# Altium PCB PCB.PcbDoc
Units mm, origin at the board's own origin, x right, y up, seen from the top; angles counter-clockwise.
Board outline 100 x 52 mm, 2 copper layers (Top Layer, Bottom Layer); 89 components, 60 nets, 356 pads, 102 vias.
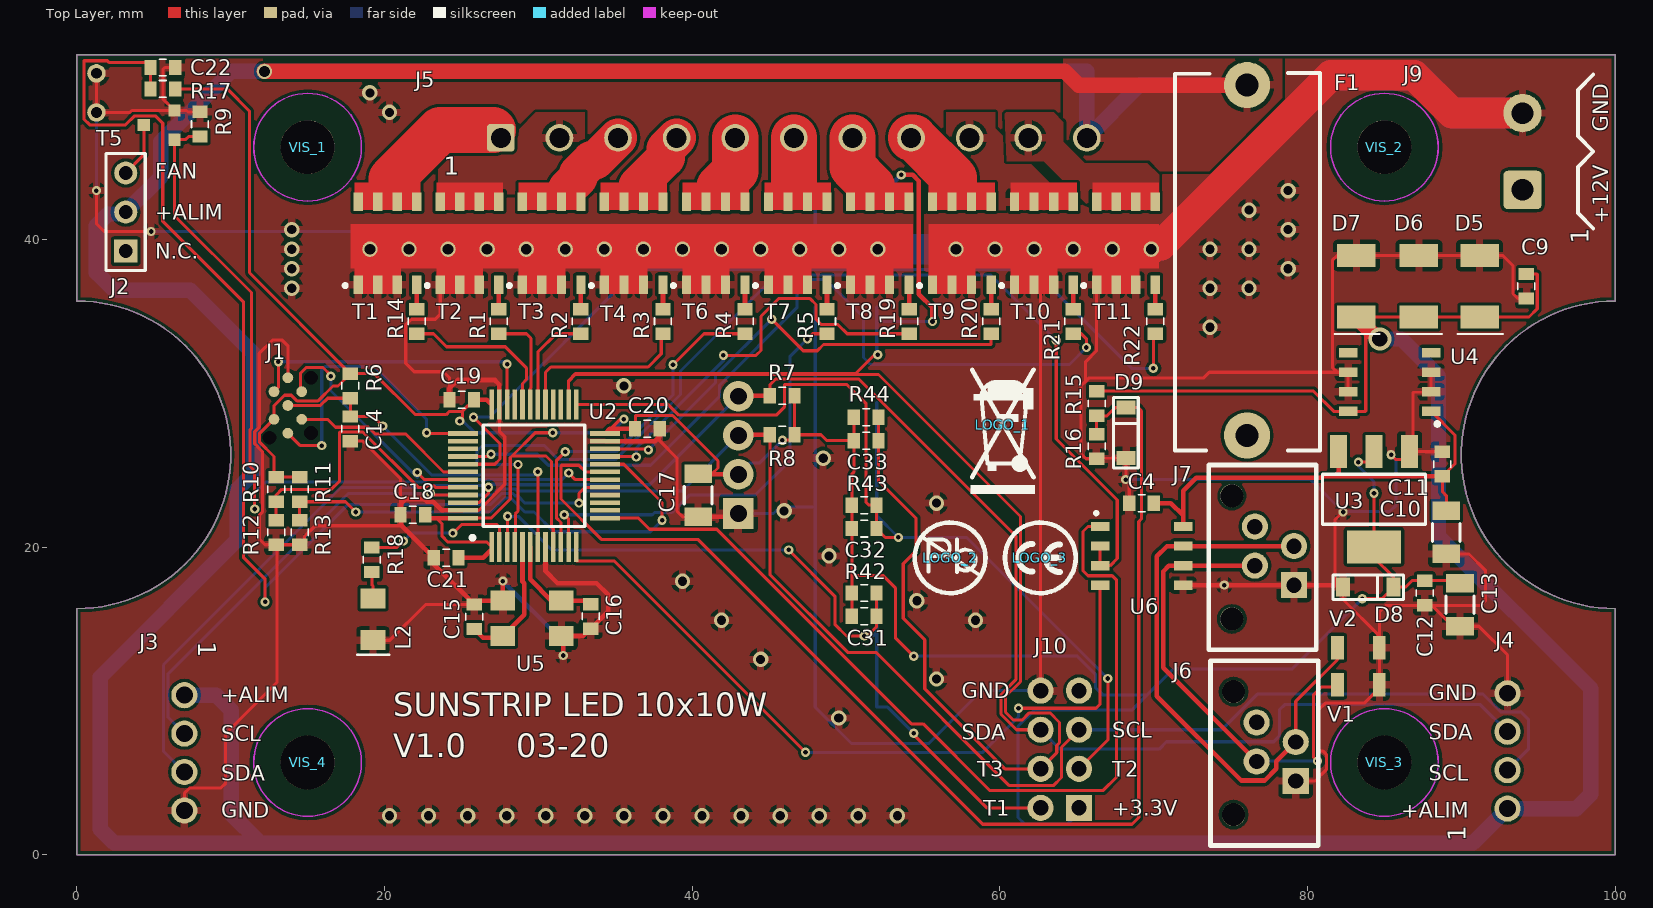
[diagram p0: Top Layer view]
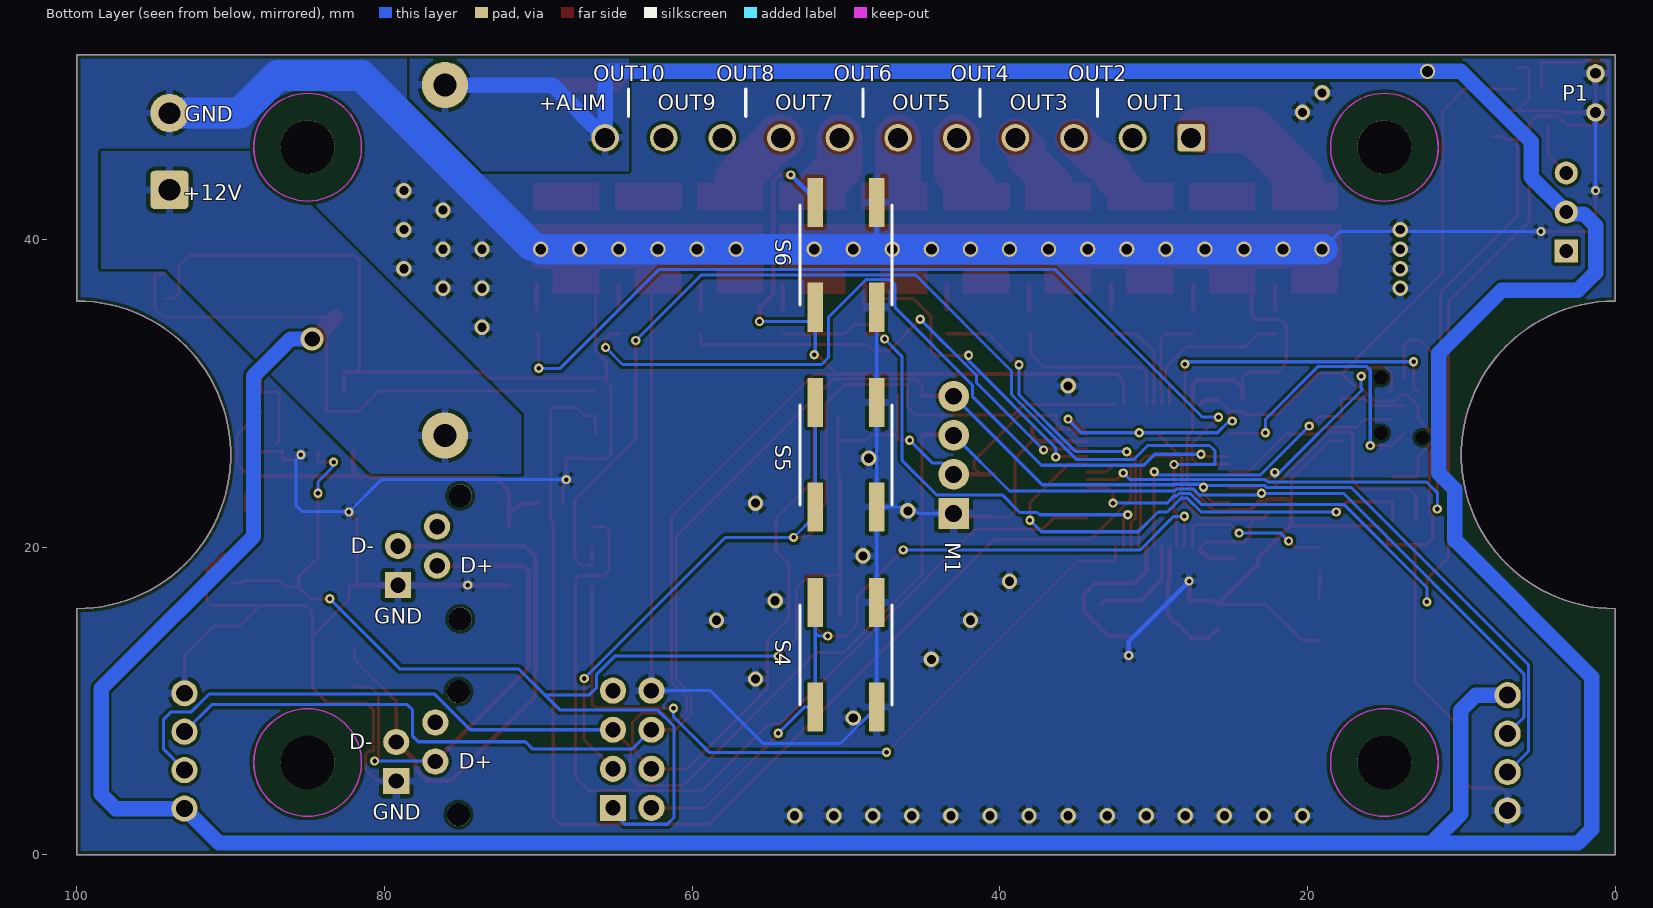
[diagram p1: Bottom Layer view, seen from below]
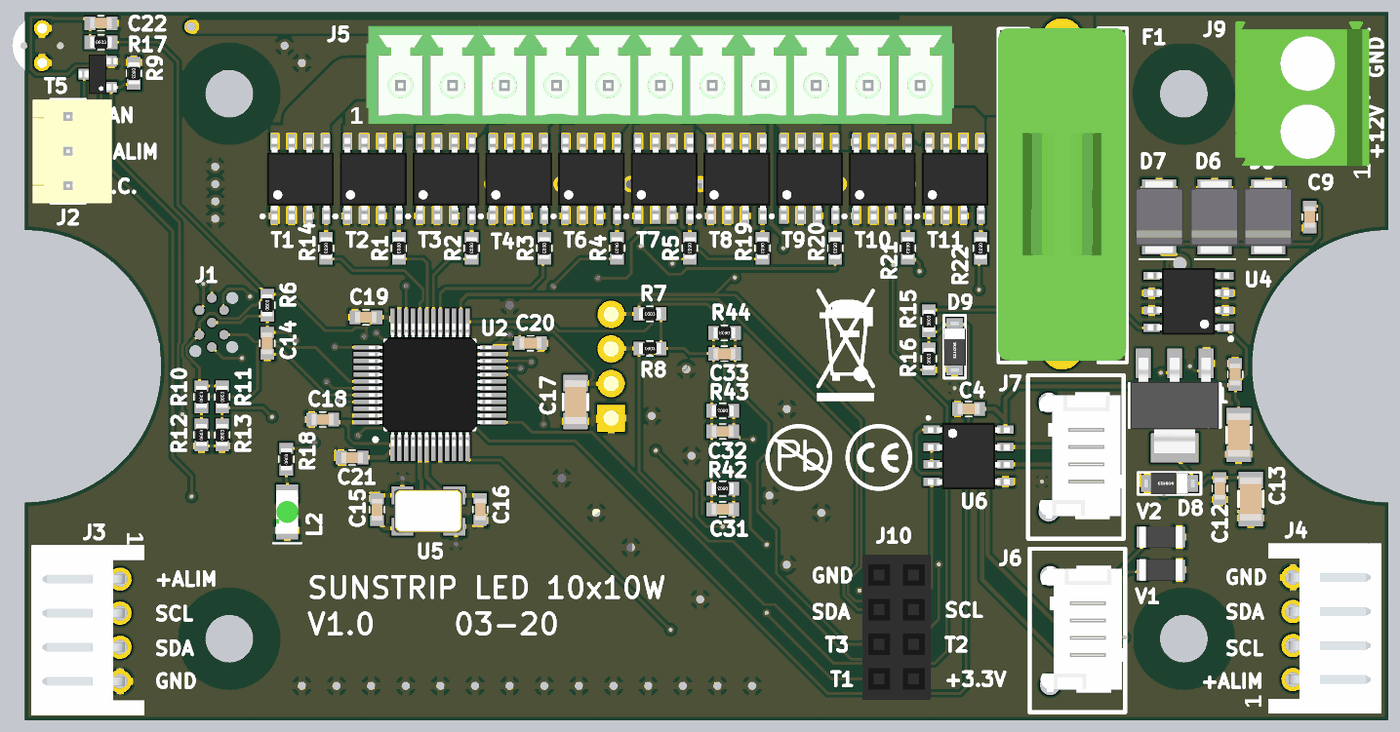
[diagram p2: 3D render of the assembled board from above, using the file's embedded part models]
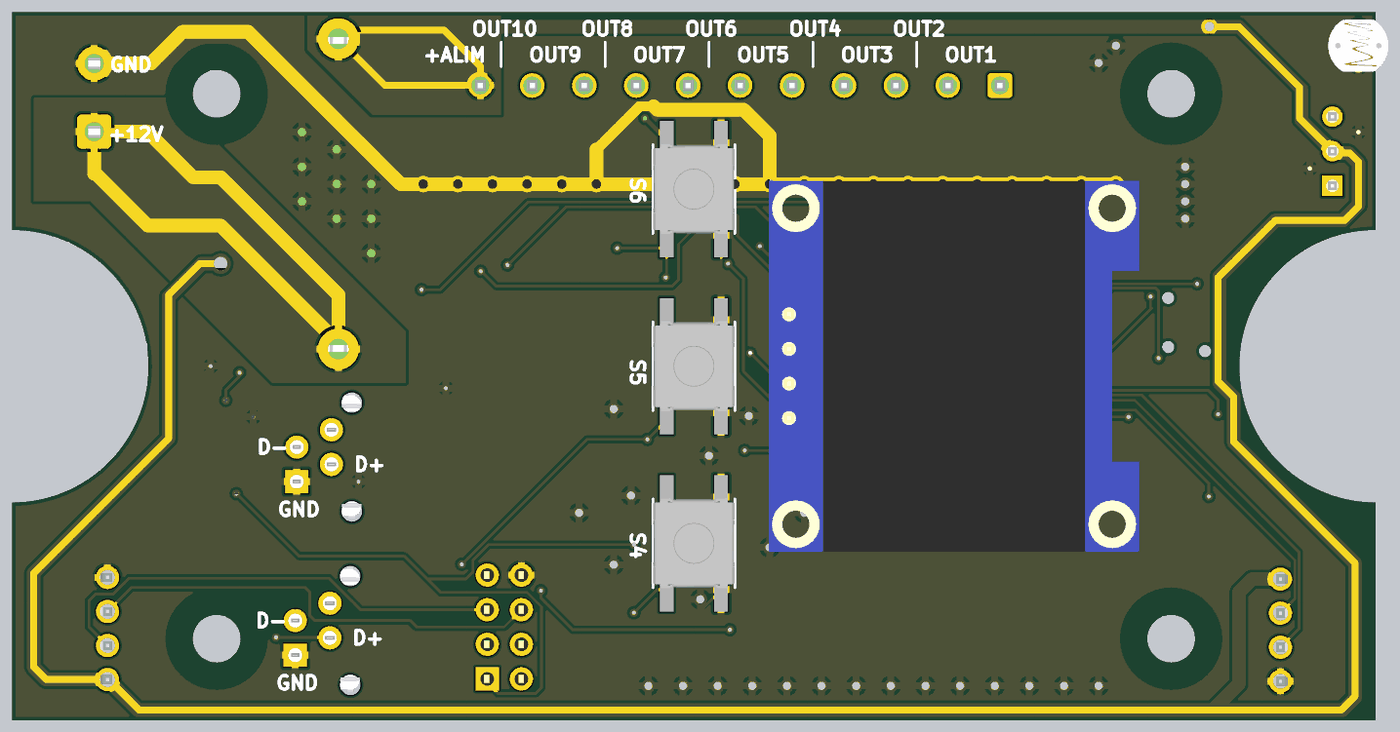
[diagram p3: 3D render of the assembled board from below, using the file's embedded part models]

## Layer stack, top to bottom
Top Solder: solder mask 0.0102, Solder Resist, Dk 3.5
Top Layer: signal copper 0.0356
Dielectric 1: dielectric 0.32, FR-4, Dk 4.8
Bottom Layer: signal copper 0.0356
Bottom Solder: solder mask 0.0102, Solder Resist, Dk 3.5

## Board outline
0,0 0,16 ccw(c0,26) 0,36 0,52 100,52 100,36 ccw(c100,26) 100,16 100,0

## Design rules (kind name [scope] priority, off if disabled: settings)
Clearance [All] p1: gap=0.102 ignorepadtopadclearanceinfootprint=FALSE except(0: Arc-Hole Track-Hole SMDPad-Hole THPad-Hole Via-Hole Fill-Hole Poly-Hole Region-Hole Text-Hole; 0.2: Arc-Fill Arc-Poly Arc-Region Track-Fill Track-Poly Track-Region SMDPad-Fill SMDPad-Poly SMDPad-Region THPad-Fill THPad-Poly THPad-Region Via-Fill Via-Poly Via-Region Fill-Fill Fill-Poly Fill-Region Poly-Poly Poly-Region Region-Region)
HoleSize [All] p1: absolutevalues=TRUE maxlimit=6.3 minlimit=0.2 maxpercent=80.000 minpercent=20.000
PlaneConnect [All] p1: planeconnectstyle=Relief reliefexpansion=0.5 reliefentries=4 reliefconductorwidth=0.5 reliefairgap=0.254
PolygonConnect [All] p1: connectstyle=Relief reliefconductorwidth=0.5 reliefentries=4 polygonreliefangle="90 Angle" airgapwidth=0.254
RoutingVias [All] p1: holewidth=0.3 width=0.6 viastyle="Through Hole" minholewidth=0.2 minwidth=0.5 maxholewidth=6.3 maxwidth=10
SolderMaskExpansion [All] p1: expansion=0.102
Width [All] p1: maxlimit=5 minlimit=0.104 preferedwidth=0.2
28 further rules are at their usual default settings.

## Classes and differential pairs
component class IHM: C17 C31 C32 C33 J10 M1 R7 R8 R42 R43 R44 S4 S5 S6
component class MCU: C4 C14 C15 C16 C18 C19 C20 C21 C22 D9 J1 J3 J4 J6 J7 L2 P1 R6 R10 R11 R12 R13 R15 R16 R17 R18 U2 U5 U6 V1 V2
component class Mechanical: LOGO_1 LOGO_2 LOGO_3 VIS_1 VIS_2 VIS_3 VIS_4
component class Outputs: J2 J5 R1 R2 R3 R4 R5 R9 R14 R19 R20 R21 R22 T2 T3 T4 T5 T6 T7 T8 T9 T10 T11
component class Power_Supply: C9 C10 C11 C12 C13 D5 D6 D7 D8 F1 J9 U3 U4

## Components (designator, comment, footprint, x,y, rotation, side; value= is the part's Value field where it differs from the comment)
C4 "100nF" C0603 69.215,22.86 r0 top
C9 "100nF" C0603 94.234,36.957 r270 top
C10 "10uF-50V" C1206 89.027,20.955 r90 top
C11 "100nF" C0603 88.773,25.4 r90 top
C12 "100nF" C0603 87.63,17.018 r270 top
C13 "10uF-50V" C1206 89.916,16.256 r90 top
C14 "100nF" C0603 17.78,27.686 r90 top
C15 "15pF" C0603 25.825,15.473 r90 top
C16 "15pF" C0603 33.401,15.494 r90 top
C17 "10uF-50V" C1206 40.386,23.368 r90 top
C18 "100nF" C0603 21.844,22.098 r0 top
C19 "100nF" C0603 25.019,29.591 r0 top
C20 "100nF" C0603 37.084,27.686 r180 top
C21 "100nF" C0603 24.003,19.304 r0 top
C22 "100nF" C0603 5.588,51.181 r180 top
C31 "100nF" C0603 51.181,15.494 r180 top
C32 "100nF" C0603 51.181,21.209 r180 top
C33 "100nF" C0603 51.308,26.924 r180 top
D5 "T47V" DIO47A 91.186,36.957 r90 top
D6 "T47V" DIO47A 87.249,36.957 r90 top
D7 "T47V" DIO47A 83.185,36.957 r90 top
D8 "3,6v" SOD123 83.947,17.399 r0 top
D9 "3,6v" SOD123 68.199,27.432 r90 top
F1 "FUS 5X20" FUSPO-A1 76.073,38.648 r90 top
J1 "" CON_PROG 12.216,27.41 r90 top
J2 "CUM/F3" HDR1X3 3.175,41.783 r90 top
J3 "CUM/F4" CNT4F5 6.985,6.624 r270 top
J4 "CUM/F4" CNT4F5 93,6.75 r90 top
J5 "CUM/F11" CNT11D 46.609,46.609 r0 top
J6 "CUM/F4" CNT4S 77.216,6.604 r270 top
J7 "CUM/F4" CNT4S 77.101,19.336 r270 top
J9 "CUM/F2" CNT2H 93.98,45.72 r90 top
J10 "CUM/F8" BARF-2X4 65.151,3.048 r90 top
L2 "LED-V" LED-V1A 19.248,15.309 r90 top
LOGO_1 "LOGO_NePasJeter" LogoNePasJeter 60.198,27.94 r0 top
LOGO_2 "LOGO_Poubelle" LogoPB 56.769,19.304 r0 top
LOGO_3 "LOGO_CE" LogoCE 62.611,19.304 r0 top
M1 "" I2C_OLED_0.96 43,22.19 r90 bottom locked
P1 "CTN5K" DIV015 1.27,49.53 r270 bottom
R1 "1k" R0603 27.432,34.671 r270 top
R2 "1k" R0603 32.766,34.671 r270 top
R3 "1k" R0603 38.1,34.671 r270 top
R4 "1k" R0603 43.434,34.671 r270 top
R5 "1k" R0603 48.768,34.671 r270 top
R6 "10K" R0603 17.78,30.48 r90 top
R7 "10K" R0603 45.847,29.845 r0 top value=100K
R8 "10K" R0603 45.847,27.305 r0 top value=100K
R9 "1M" R0603 8.001,47.498 r270 top
R10 "10K" R0603 12.954,23.749 r90 top
R11 "10K" R0603 14.478,23.749 r90 top
R12 "10K" R0603 12.954,20.955 r90 top
R13 "10K" R0603 14.478,20.955 r90 top
R14 "1k" R0603 22.098,34.671 r270 top
R15 "100K" R0603 66.294,29.337 r90 top
R16 "5K" R0603 66.294,26.543 r90 top
R17 "10K" R0603 5.588,49.784 r0 top
R18 "1K" R0603 19.177,19.177 r90 top
R19 "1k" R0603 54.102,34.671 r270 top
R20 "1k" R0603 59.436,34.671 r270 top
R21 "1k" R0603 64.77,34.671 r270 top
R22 "1k" R0603 70.104,34.671 r270 top
R42 "100K" R0603 51.181,17.018 r180 top
R43 "100K" R0603 51.181,22.733 r180 top
R44 "100K" R0603 51.308,28.448 r180 top
S4 "TOUCHE" INT-CMS1 50,13 r90 bottom locked
S5 "TOUCHE" INT-CMS1 50,26 r90 bottom locked
S6 "TOUCHE" INT-CMS1 50,39 r90 bottom locked
T1 "VNS14NV04" TRA14NV04 20.193,39.751 r0 top
T2 "VNS14NV04" TRA14NV04 25.527,39.751 r0 top
T3 "VNS14NV04" TRA14NV04 30.861,39.751 r0 top
T4 "VNS14NV04" TRA14NV04 36.195,39.751 r0 top
T5 "BSR202N" TRA202 5.35,47.437 r90 top
T6 "VNS14NV04" TRA14NV04 41.529,39.751 r0 top
T7 "VNS14NV04" TRA14NV04 46.863,39.751 r0 top
T8 "VNS14NV04" TRA14NV04 52.197,39.751 r0 top
T9 "VNS14NV04" TRA14NV04 57.531,39.751 r0 top
T10 "VNS14NV04" TRA14NV04 62.865,39.751 r0 top
T11 "VNS14NV04" TRA14NV04 68.199,39.751 r0 top
U2 "STM32F103C8T6" TQFP-48 29.718,24.638 r90 top
U3 "TLV1117" SOT223 84.328,23.114 r180 top
U4 "78L05" REG5VE 85.344,30.734 r180 top
U5 "QUARTZ-8MHZ" QUA8G 29.596,15.374 r180 top
U6 "CI485" CIA485A 69.215,19.431 r270 top
V1 "V47V" VAR47A 83.312,11.049 r0 top
V2 "V47V" VAR47A 83.312,13.462 r0 top
VIS_1 "VIS" HOLE3.5mm 15,46 r0 top locked
VIS_2 "VIS" HOLE3.5mm 85,46 r0 top locked
VIS_3 "VIS" HOLE3.5mm 85,6 r0 top locked
VIS_4 "VIS" HOLE3.5mm 15,6 r0 top locked

## Footprints (in the part's own frame and the unit in brackets; to place one, negate y for a bottom-side part, rotate by r counter-clockwise, add the part's x,y. Pads: shape width x height; smd on the part's side, far side on the other; paste and mask are expansions set on the pad)
BARF-2X4 [mm]
  rect 1.7x1.7 hole 1: 1(0,0)
  round 1.7 hole 1: 2(0,2.5) 3(2.54,0) 4(2.54,2.5) 5(5.08,0) 6(5.08,2.5) 7(7.62,0) 8(7.62,2.5)
  body extent -1.52,-1.27 9.14,3.73, height 8.1
C0603 [mm] "Rotation conforme aux bobines CMS"
  rect 0.8x1 smd: 1(-0.8,0) 2(0.8,0)
  silkscreen extent -0.23,-0.55 0.22,0.55, body extent -0.8,-0.4 0.8,0.4, height 0.78
C1206 [mm] "Chip Capacitor; Body 3.2 x 1.6 mm (LxW typ)"
  rect 1.2x1.8 smd: 1(-1.4,0) 2(1.4,0)
  silkscreen extent -0.57,-0.9 0.58,0.9, body extent -1.6,-0.8 1.6,0.8, height 0.77
CIA485A [mm]
  rect 0.6x1.2 smd: 1(-1.905,-2.7) 2(-0.635,-2.7) 3(0.635,-2.7) 4(1.905,-2.7) 5(1.905,2.7) 6(0.635,2.7) 7(-0.635,2.7) 8(-1.905,2.7)
  silkscreen extent -2.87,-3.05 -2.68,-2.85, body extent -2.42,-3 2.48,3, height 1.75
CNT2H [mm]
  rrect25% 2.5x2.5 hole 1.4: 1(-2.5,0)
  round 2.5 hole 1.4: 2(2.5,0)
  silkscreen extent -5,-4.6 5,-3.6, body extent -5,-4.6 5.6,5.2, height 13.8
CNT4F5 [mm] "Connecteur J"
  round 1.7 hole 1.1: 1(-3.75,0) 2(-1.25,0) 3(1.25,0) 4(3.75,0)
  body extent -6.25,-6.5 6.25,1.8, height 4.21
CNT4S [mm]
  round 1.5 hole 1.5 unplated: 0(-4,-2.02) 0(4,-2.02)
  rect 1.7x1.7 hole 1: 1(1.81,2.02)
  round 1.7 hole 1: 2(0.54,-0.52) 3(-0.73,2.02) 4(-2,-0.52)
  silkscreen extent -6,-3.52 6,3.48, body extent -4.75,-2.72 4.57,3.56, height 6.41
CNT11D [mm] "Embase debrochable - pas 3.81-"
  rrect25% 1.8x1.8 hole 1.3: 1(-19.05,0)
  round 1.8 hole 1.3: 2(-15.24,0) 3(-11.43,0) 4(-7.62,0) 5(-3.81,0) 6(0,0) 7(3.81,0) 8(7.62,0) 9(11.43,0) 10(15.24,0) 11(19.05,0)
  body extent -21.55,-2.8 21.55,4.4, height 9.21
CON_PROG [mm]
  round 0.7 smd: 1(0.9,-0.6) 2(2.7,-0.6) 3(0,-1.5) 4(1.8,-1.5) 5(3.6,-1.5) 6(0.9,-2.4) 7(2.7,-2.4)
  round 0 hole 0.9 unplated: H(-0.3,-0.3) H(0,-3) H(3.6,-3)
DIO47A [mm]
  rect 1.5x2.5 smd: 1(-2,0) 2(2,0)
  silkscreen extent -3.1,-1.5 -3.1,1.43, body extent -2.7,-1.8 2.7,1.8, height 2.3
DIV015 [mm]
  round 1.2 hole 0.7: 1(-1.27,0) 2(1.27,0)
  body extent -1.9,-2.22 1.91,2.23, height 1.78
FUSPO-A1 [mm]
  round 3 hole 1.5: 1(-11.39,0) 2(11.39,0)
  silkscreen extent -12.37,-4.75 12.17,4.67, body extent -12.22,-4.7 12.17,4.7, height 23.71
HDR1X3 [mm] "Connector; Header; 3 Position"
  rect 1.5x1.5 hole 0.9: 1(-2.54,0)
  round 1.5 hole 0.9: 2(0,0) 3(2.54,0)
  silkscreen extent -3.81,-1.27 3.81,1.27, body extent -3.81,-3.2 3.81,2.6, height 11.5
HOLE3.5mm [mm]
  round 3.5 hole 3.5 unplated mask+0: 3(0,0)
  Keep-Out Layer circle w0.1: c0,0 r3.5
I2C_OLED_0.96 [mm]
  rect 2x2 hole 1.1: 1(0,0)
  round 2 hole 1.1: 2(2.54,0) 3(5.08,0) 4(7.62,0)
  body extent -9.79,-25.68 17.41,1.52, height 5.5
INT-CMS1 [mm]
  rect 3.2x1 smd: 1(-3.4,-2) 1(3.4,-2) 4(-3.4,2) 4(3.4,2)
  silkscreen extent -3.25,-3 3.25,3, body extent -3.3,-3 3.3,3, height 3.1
LED-V1A [mm]
  rect 1.3x1.6 smd: 1(1.362,0) 2(-1.363,0)
  silkscreen extent -2.3,-1.06 -2.3,1.02, body extent -1.6,-0.8 1.6,0.8, height 1.8
LogoCE [mm]
  silkscreen extent -2.27,-2.3 2.33,2.3
LogoNePasJeter [mm]
  silkscreen extent -2.1,-4.5 2.1,3.6
LogoPB [mm]
  silkscreen extent -2.3,-2.3 2.3,2.3
QUA8G [mm]
  rect 1.6x1.3 smd: 1(-1.9,-1.15) 2(1.9,-1.15) 3(1.9,1.15) 4(-1.9,1.15)
  body extent -2.5,-1.6 2.5,1.6, height 1
R0603 [mm] "Rotation conforme aux bobines CMS"
  rect 0.8x1 smd: 1(-0.8,0) 2(0.8,0)
  silkscreen extent -0.23,-0.55 0.23,0.55, body extent -0.8,-0.4 0.8,0.4, height 0.44
REG5VE [mm]
  rect 1.2x0.6 smd: 1(-2.7,1.905) 2(-2.7,0.635) 3(-2.7,-0.635) 4(-2.7,-1.905) 5(2.7,-1.905) 6(2.7,-0.635) 7(2.7,0.635) 8(2.7,1.905)
  silkscreen extent -3.2,2.63 -3,2.82, body extent -3,-2.48 3,2.42, height 1.75
SOD123 [mm]
  rect 0.91x1.22 smd: 1(-1.635,0) 2(1.635,0)
  silkscreen extent -2.3,-0.8 2.3,0.8, body extent -1.85,-0.8 1.85,0.8, height 1.28
SOT223 [mm] "SOT-223/SC-73; 4 Leads; Body 6.7 x 7.3 mm, inc. leads (LxW max)"
  rect 1.1x2.15 smd: 1(-2.3,-3.1) 2(0,-3.1) 3(2.3,-3.1)
  rect 3.5x2.15 smd: 4(0,3.1)
  silkscreen extent -3.35,-1.63 3.35,1.63, body extent -3.25,-3.5 3.25,3.5, height 1.64
TQFP-48 [mm] "TQFP-64Pins - 0.5 mm Pitch - 10 x 10 mm"
  rect 1.95x0.3 smd: 1(-4.625,2.75) 2(-4.625,2.25) 3(-4.625,1.75) 4(-4.625,1.25) 5(-4.625,0.75) 6(-4.625,0.25) 7(-4.625,-0.25) 8(-4.625,-0.75) 9(-4.625,-1.25) 10(-4.625,-1.75) 11(-4.625,-2.25) 12(-4.625,-2.75) 25(4.625,-2.75) 26(4.625,-2.25) 27(4.625,-1.75) 28(4.625,-1.25) 29(4.625,-0.75) 30(4.625,-0.25) 31(4.625,0.25) 32(4.625,0.75) 33(4.625,1.25) 34(4.625,1.75) 35(4.625,2.25) 36(4.625,2.75)
  rect 0.3x1.95 smd: 13(-2.75,-4.625) 14(-2.25,-4.625) 15(-1.75,-4.625) 16(-1.25,-4.625) 17(-0.75,-4.625) 18(-0.25,-4.625) 19(0.25,-4.625) 20(0.75,-4.625) 21(1.25,-4.625) 22(1.75,-4.625) 23(2.25,-4.625) 24(2.75,-4.625) 37(2.75,4.625) 38(2.25,4.625) 39(1.75,4.625) 40(1.25,4.625) 41(0.75,4.625) 42(0.25,4.625) 43(-0.25,4.625) 44(-0.75,4.625) 45(-1.25,4.625) 46(-1.75,4.625) 47(-2.25,4.625) 48(-2.75,4.625)
  silkscreen extent -4.15,-3.3 3.3,4.12, body extent -4.5,-4.5 4.5,4.5, height 1.4
TRA14NV04 [mm]
  rect 0.6x1.2 smd: 1(-1.905,-2.7) 2(-0.635,-2.7) 3(0.635,-2.7) 4(1.905,-2.7) 5(1.905,2.7) 6(0.635,2.7) 7(-0.635,2.7) 8(-1.905,2.7)
  silkscreen extent -2.85,-2.85 -2.65,-2.65, body extent -2.42,-3 2.48,3, height 1.75
TRA202 [mm] "MOS-N 20V 12mOhms BSR202N"
  rect 0.8x0.8 smd: 1(-0.95,-1) 2(0.95,-1) 3(0,1)
  body extent -1.45,-1.4 1.45,1.4, height 1.3
VAR47A [mm]
  rect 0.825x1.524 smd: 1(-1.363,0) 2(1.362,0)
  body extent -1.6,-0.8 1.6,0.8, height 1.51

## Part data
C4 C9 C10 C11 C12 C13 C14 C15 C16 C17 C18 C19 C20 C21 C22 C31 C32 C33: library part Cap, "Capacitor"
D5 D6 D7: "TRANSIL CMS 47V unidirectionnelle"
D8 D9: library part "D Zener", "Zener Diode"
F1: "FUSIBLE VERRE 5 x 20"
J1: library part CON-PROG, "Programming Connector"
J2: "connecteur 3 points"
J3 J4 J6 J7: "connecteur  4 points"
J5: "connecteur 10 points"
J9: "connecteur  2 points"
J10: "connecteur 8 points"
L2: "LED  piquer  ou  CMS verte"
LOGO_1: "Logo Ne Pas Jeter (sérigraphie)"
LOGO_2: "Logo poubelle (sérigraphie)"
LOGO_3: "Logo CE (sérigraphie)"
M1: library part I2C-OLED-0.96, "I2C OLED 0.96\""
P1: "Photoresistance"
R1 R2 R3 R4 R5 R6 R7 R8 R9 R10 R11 R12 R13 R14 R15 R16 R17 R18 R19 R20 R21 R22 R42 R43 R44: library part Res, "Thin Metal Film Resistor"
S4 S5 S6: "Touche"
T1 T2 T3 T4 T5 T6 T7 T8 T9 T10 T11: "TRANSISTOR MOS N"
U2: "ARM Cortex-M3 32-bit MCU, 64 KB Flash, 20 KB Internal RAM, 37 I/Os, 48-pin LQFP, -40 to 85 degC, Tray", I/Os (High Current)=37, Operating Frequency(F) (Processor speed) (MHz)=72, Supply Voltage(Vcc) min (V)=2, A/D Converter="2x12-bit (10 Channel)", ComponentLink1Description="Manufacturer URL", ComponentLink1URL=http://www.st.com/web/en/home.html, ComponentLink2Description=Datasheet, ComponentLink2URL=http://www.st.com/st-web-ui/static/active/en/resource/technical/document/datasheet/CD00161566.pdf, ComponentLink3Description="Package Specification", ComponentLink3URL=http://www.st.com/st-web-ui/static/active/en/resource/technical/document/datasheet/DM00058181.pdf, Core="ARM Cortex-M3", DatasheetVersion="Rev. 16", FLASH Size (Prog) (kB)=64, Internal RAM Size (kB)=20, Mounting Technology="Surface Mount", PackageDescription="48-Pin Low Profile Quad Flat Package, 7 x 7 mm Body, 0.5 mm Pitch", PackageReference=LQFP48, PackageVersion="Rev. 6, 06/2013", Packing=Tray, PartNumber=STM32F103C8T6
U3: "LDO regulator 3.3V", Fabricant=Texas, Fournisseur=Farnell, Prix=0.75, Ref_Fabricant=TLV1117, Ref_Fournisseur=1703385
U4: "E:cms ;C1:faible conso; VD:TO220 debout;"
U5: "QUARTZ 8 MHZ CMS"
U6: "DRIVER  RS485"
V1 V2: "VARISTANCE 47V BOITIER 1206"

## Free pads (board coordinates)
  round 1 hole 0.7: 48(19.05,39.37) 49(21.59,39.37) 50(24.13,39.37) 51(26.67,39.37) 52(29.21,39.37) 53(31.75,39.37) 54(34.29,39.37) 55(36.83,39.37) 56(39.37,39.37) 57(41.91,39.37) 58(44.45,39.37) 59(46.99,39.37) 60(49.53,39.37) 61(52.07,39.37) 63(57.15,39.37) 64(59.69,39.37) 65(62.23,39.37) 66(64.77,39.37) 67(67.31,39.37) 68(69.85,39.37) 69(12.192,50.927)

## Via types
v1: diameter 0.6, hole 0.3, Top Layer to Bottom Layer, tented both sides, 60 vias
v2: diameter 1, hole 0.6, Top Layer to Bottom Layer, tented both sides, 41 vias
v3: diameter 1.5, hole 1, Top Layer to Bottom Layer, tented both sides, 1 vias

## Nets (pads, with @x,y where several pads share a name; then routed paths per layer and width w, separated by ;. In a path a pad name is that pad's centre, name@x,y a point inside that pad or via, vN(x,y) a via of type N, cw(c..) or ccw(c..) an arc to the next point about the centre after c; other vN are vias at no path point)
+3.3V: C12.1 C13.2 C17.2 C18.2 C19.2 C20.2 C21.2 C31.2 C32.2 C33.2 D8.2 J1.1 J10.1 M1.2 R6.2 R7.2 R8.2 R10.2 R11.2 R17.2 R42.2 R43.2 R44.2 U2.1 U2.9 U2.24 U2.36 U2.48 U3.2 U3.4 | length 209.8
  Top Layer w0.2: R17.2 6.388,49.789 9.772,49.789 11.22,48.341 11.22,37.84 R6.2 ; R11.2 R10.2 12.816,24.687 12.816,25.888 11.864,26.84 11.864,27.38 12.794,28.31 J1.1 12.816,29.199 13.492,29.875 13.94,29.875 14.303,29.512 15.686,29.512 16.655,30.48 16.98,30.48 R6.2 ; 23.368,21.888 23.749,21.507 23.749,20.701 24.13,20.32 26.661,20.32 U2.1 26.968,19.856 U2.1@26.968,19.588 ; v1(24.892,28.194) 25.057,28.359 25.057,28.829 ; U2.48 26.939,21.888 28.174,23.123 28.174,25.811 28.285,25.922 ; C19.2 25.057,28.829 ; v1(30.93,27.437) 29.8,27.437 28.285,25.922 ; U2.9 30.968,21.19 30.858,21.3 30.858,25.562 30.498,25.922 28.285,25.922 ; U2.24 35.197,27.388 34.899,27.686 34.798,27.787 35.332,28.321 v1(35.56,28.321) ; C20.2 36.309,28.554 38.728,28.554 41.674,25.608 41.674,25.149 41.293,24.768 C17.2 ; v1(45.865,26.954) 46.647,26.954 R8.2 ; R7.2 R8.2 ; C31.2 R42.2 50.381,18.389 ; R44.2 C33.2 ; v1(54.4,12.908) 53.206,14.102 53.206,17.353 52.398,18.161 50.609,18.161 50.381,18.389 ; v1(83.312,25.527) U3.2@84.328,25.527 ; v1(83.559,16.642) 84.843,16.642 85.581,17.38 D8.2 ; v1(84.328,23.495) U3.4 84.328,19.318 85.582,18.064 D8.2 ; U3.2@84.328,25.4 U3.2@84.328,25.527 ; U3.2 U3.2@84.328,25.527 ; C13.2 89.317,17.656 89.155,17.818 C12.1 86.797,17.818 86.378,17.399 D8.2 ; R6.2 19.34,31.28 22.008,28.612 24.003,28.612 24.22,28.829 25.057,28.829 ; R8.2 48.38,27.305 48.761,26.924 C33.2 ; 50.381,18.389 C32.2 R43.2 50.381,24.744 50.508,24.871 C33.2
  Top Layer w0.3: C18.2 22.854,21.888 23.368,21.888 U2.48 ; C21.2 26.416,19.304 U2.1@26.968,19.856 ; C19.2 26.64,29.591 U2.36 ; U2.24 34.641,27.686 34.899,27.686 C20.2 ; C17.2 40.424,24.73 M1.2
  Bottom Layer w0.2: v1(24.892,28.194) 25.093,28.194 25.824,27.463 ; v1(35.56,28.321) 35.56,28.282 34.715,27.437 v1(30.93,27.437) 25.85,27.437 ; M1.2 43.726,25.456 44.367,25.456 v1(45.865,26.954) ; v1(54.4,12.908) 65.042,12.908 66.211,11.74 66.211,10.876 66.693,10.393 69.575,10.393 ; J10.1 65.151,2.755 64.382,1.986 61.613,1.986 61.182,2.418 61.182,8.35 62.23,9.398 68.58,9.398 69.575,10.393 ; 69.596,10.414 69.575,10.393 ; v1(83.312,25.527) 83.312,25.259 84.328,24.243 v1(84.328,23.495) ; v1(83.559,16.642) 78.982,12.065 71.261,12.065 69.589,10.393 69.575,10.393 ; 25.824,27.463 25.85,27.437 ; 25.824,27.463 25.825,27.437 25.85,27.437
+5V: C4.2 C10.2 C11.1 U3.3 U4.1 U6.8 | length 31.1
  Top Layer w0.2: U4.1 89.579,27.294 89.579,25.406 C11.1 88.773,23.601 89.027,23.347 C10.2
  Top Layer w0.3: C4.2 71.12,22.86 71.915,22.065 ; U6.8 71.915,22.065 ; U3.3 82.028,24.878 81.75,24.6 ; C11.1 81.75,24.6 ; 71.915,22.065 71.915,23.655 72.771,24.511 80.899,24.511 80.988,24.6 81.75,24.6
+ALIM: C9.1 D5.1 D6.1 D7.1 F1.2 J2.2 J3.1 J4.1 J5.11 pad.69 R15.2 U4.8 | length 389.5
  Top Layer w0.2: R15.2 80.392,30.137 81.7,28.829 U4.8 83.762,28.829 83.788,28.854 83.788,34.354 D7.1@83.788,34.957 ; D7.1 D7.1@83.788,34.957 ; C9.1 94.913,37.757 94.938,37.732 94.938,35.489 94.407,34.957 D5.1 D6.1 D7.1@83.788,34.957
  Top Layer w1: pad.69 64.225,50.927 65.114,50.038 F1.2 ; D7.1 83.788,34.354 84.614,33.528 v3(84.709,33.528)
  Bottom Layer w1: J3.1 9.057,10.374 10.033,9.398 10.033,2.667 11.938,0.762 ; F1.2 69.088,50.038 J5.11 65.659,50.927 pad.69 10.033,50.927 5.461,46.355 5.461,44.069 J2.2 3.048,41.656 2.032,41.656 1.27,40.894 1.27,37.846 2.413,36.703 7.366,36.703 11.464,32.605 11.464,24.799 10.42,23.755 10.42,20.453 1.524,11.557 1.524,1.651 2.413,0.762 11.938,0.762 ; v3(84.709,33.528) 86.106,33.528 88.519,31.115 88.519,20.701 98.425,10.795 98.425,3.937 97.488,3 J4.1 90.762,0.762 11.938,0.762
BOOT0: R10.1 R12.2 U2.44 | length 18.9
  Top Layer w0.2: R12.2 R10.1 12.954,23.386 13.322,23.754 16.528,23.754 17.078,24.304 17.078,27.462 17.104,27.488 18.59,27.488 22.189,23.888 22.671,23.888 22.779,23.997 23.195,23.997 23.303,23.888 U2.44
BOOT1: R11.1 R13.2 U2.20 | length 32.5
  Top Layer w0.2: R13.2 R11.1 17.46,22.949 v1(18.129,22.281) ; U2.20 35.553,25.388 38.042,22.899 v1(38.042,21.747)
  Bottom Layer w0.2: v1(18.129,22.281) 26.906,22.281 27.808,23.182 28.223,23.182 29.125,22.281 29.719,22.281 31,21 37.295,21 v1(38.042,21.747)
CTN: C22.2 R17.1 U2.17 | length 76.1
  Top Layer w0.2: R17.1 C22.2 4.788,51.516 2.076,51.516 1.974,51.618 0.476,51.618 0.45,51.592 0.45,47.833 0.831,47.452 3.166,47.452 3.752,48.039 5.098,48.039 5.581,47.556 5.581,41.178 10.839,35.92 10.839,19.309 12.236,17.912 v1(12.236,16.439) ; v1(32.639,22.86) 32.639,23.495 33.032,23.888 U2.17
  Bottom Layer w0.2: v1(12.236,16.439) 12.236,17.372 17.646,22.782 26.911,22.782 27.612,23.484 28.348,23.484 28.491,23.341 28.651,23.341 29.132,22.86 v1(32.639,22.86)
DIN: U2.13 U6.1 | length 60
  Top Layer w0.2: U2.13 36.504,21.888 37.229,21.163 41.598,21.163 54.249,8.512 55.014,8.512 59.335,4.191 66.727,4.191 67.596,5.06 67.596,17.848 67.303,18.14 65.728,18.14 65.405,18.464 65.405,21.013 65.728,21.336 U6.1
DMX+: J6.2 J7.2 U6.6 V1.1 | length 31.3
  Top Layer w0.2: v1(80.645,6.096) 80.384,6.357 80.384,10.368 80.917,10.901 81.949,10.901 V1.1
  Top Layer w0.3: J7.2 U6.6 70.993,18.796 70.612,18.415 70.612,12.148 J6.2
  Bottom Layer w0.2: J6.2 76.728,6.096 v1(80.645,6.096)
DMX-: J6.3 J7.3 U6.7 V2.1 | length 38.2
  Top Layer w0.2: J6.3 79.236,9.973 81.949,12.686 V2.1
  Top Layer w0.3: J7.3 U6.7 70.866,20.066 70.21,19.41 70.21,10.308 75.692,4.826 77.216,4.826 77.978,5.588 77.978,6.076 J6.3
DOUT: U2.12 U6.4 | length 49.5
  Top Layer w0.2: U2.12 32.468,19.106 34.918,19.106 v1(47.364,6.66) ; v1(61.214,9.525) 66.257,9.525 66.516,9.784 U6.4
  Bottom Layer w0.2: v1(47.364,6.66) 58.896,6.66 61.214,8.978 v1(61.214,9.525)
FAN: R9.2 T5.1 U2.18 | length 52.5
  Top Layer w0.2: R9.2 7.265,46.698 7.054,46.487 T5.1 6.35,41.552 11.347,36.555 11.347,27.715 11.261,27.63 11.261,25.236 11.557,24.941 v1(11.557,22.479) ; v1(31.972,24.821) 32.404,24.388 U2.18
  Bottom Layer w0.2: v1(11.557,22.479) 11.557,23.532 12.261,24.236 22.593,24.236 22.745,24.389 31.54,24.389 v1(31.972,24.821)
FAN-GND: J2.3 T5.3 | length 3.6
  Top Layer w0.2: J2.3 4.35,45.498 T5.3
GND: C4.1 C9.2 C10.1 C11.2 C12.2 C13.1 C14.1 C15.2 C16.1 C17.1 C18.1 C19.1 C20.1 C21.1 C22.1 D5.2 D6.2 D7.2 D8.1 D9.1 J1.5 J3.4 J4.4 J6.1 J7.1 J9.2 J10.8 L2.2 M1.1 P1.1 P1.2 pad.48 pad.49 pad.50 pad.51 pad.52 pad.53 pad.54 pad.55 pad.56 pad.57 pad.58 pad.59 pad.60 pad.61 pad.63 pad.64 pad.65 pad.66 pad.67 pad.68 R9.1 R12.1 R13.1 R16.1 S4.1 S5.1 S6.1 T1.1 T1.2 T1.3 T2.1 T2.2 T2.3 T3.1 T3.2 T3.3 T4.1 T4.2 T4.3 T5.2 T6.1 T6.2 T6.3 T7.1 T7.2 T7.3 T8.1 T8.2 T8.3 T9.1 T9.2 T9.3 T10.1 T10.2 T10.3 T11.1 T11.2 T11.3 U2.8 U2.23 U2.35 U2.47 U3.1 U4.2 U4.3 U4.6 U4.7 U5.2 U5.4 U6.5 V1.2 V2.2 | length 574.5
  Top Layer w0.2: v1(1.27,43.18) 1.27,41.021 1.773,40.518 v1(4.826,40.518) ; P1.1 P1.2 3.447,48.26 3.574,48.387 T5.2 ; C22.1 5.715,51.181 5.588,51.054 5.588,49.149 T5.2 ; J3.4 6.985,3.993 7.328,4.336 9.353,4.336 9.67,4.653 9.67,7.879 13.008,11.216 R12.1@13.008,20.155 ; R9.1 7.219,48.298 7.13,48.387 T5.2 ; J1.5 13.716,33.094 13.353,33.457 12.718,33.457 11.855,32.593 11.855,27.797 11.563,27.505 11.563,26.715 12.059,26.219 12.059,22.271 11.855,22.067 11.855,20.528 12.228,20.155 R12.1 R12.1@13.008,20.155 ; C14.1 18.604,26.886 21.044,24.446 21.044,22.822 C18.1 21.019,21.392 15.487,21.392 14.801,20.706 14.801,20.155 R13.1 R12.1@13.008,20.155 ; L2.2 20.348,13.947 22.675,16.273 C15.2 ; T2.1 23.622,35.133 23.304,34.816 21.748,34.816 21.38,34.447 21.38,31.945 21.926,31.399 23.831,31.399 24.219,31.011 24.219,30.434 24.339,30.435 ; U2.47 26.115,22.388 26.272,22.545 26.28,22.545 27.813,24.078 27.813,27.178 27.468,27.523 U2.35 ; C20.1 37.884,27.216 37.884,26.909 39.015,25.778 39.015,22.342 39.388,21.968 C17.1 ; J10.8 62.651,39.261 63.014,39.624 70.485,39.624 ; T11.1 66.294,32.778 65.576,32.06 65.576,30.79 ; C4.1 68.415,24.211 68.199,24.427 D9.1 67.255,25.797 R16.1 65.601,25.743 65.278,26.066 65.278,30.492 65.576,30.79 ; v1(74.593,17.531) 81.938,17.531 81.788,17.681 81.788,21.788 v1@82.312,22.312 ; J6.1 80.486,4.794 81.228,5.536 81.228,6.529 81.021,6.736 80.714,6.736 80.714,9.416 81.159,9.86 83.693,9.86 84.674,10.842 V1.2 V2.2 84.674,14.229 ; D8.1 82.312,16.591 84.674,14.229 ; U4.7 U4.6 81.933,31.369 ; v1(85.439,26.002) 85.756,25.684 86.628,25.684 U3.1 87.688,26.2 C11.2 ; U3.1@87.04,26.724 86.868,26.863 86.868,30.062 U4.2 U4.3 ; C10.1 90.506,19.555 91.567,18.494 91.567,16.51 91.275,16.218 C12.2@88.08,16.218 ; J4.4 93,12.997 91.141,14.856 C13.1 89.442,14.856 C12.2@88.08,16.218 ; C9.2 93.681,36.157 93.363,36.475 93.363,38.295 92.702,38.957 D5.2 D6.2 D7.2 81.933,38.957 81.616,38.64 81.616,31.687 81.933,31.369 ; 65.576,30.79 65.772,30.986 73.265,31.011 73.623,31.369 81.933,31.369 ; 84.674,14.229 84.674,15.784 85.108,16.218 C12.2 C12.2@88.08,16.218
  Top Layer w0.3: C19.1 24.219,30.315 24.765,30.861 27.178,30.861 27.468,30.571 U2.35 ; U2.47 23.713,22.388 23.158,22.943 22.759,22.943 22.588,23.114 21.336,23.114 21.044,22.822 C18.1 21.044,21.463 C21.1 23.203,18.895 C15.2 26.075,16.524 U5.2 v1(27.696,17.79) ; U2.8 30.468,18.427 31.242,17.653 33.782,17.653 34.544,16.891 34.544,15.837 C16.1 32.931,14.224 U5.4 31.623,14.097 v1(31.623,12.954) ; U2.23 37.556,26.888 37.884,27.216 C20.1 ; C17.1 42.778,21.968 M1.1 ; U6.5 J7.1 82.185,17.526 D8.1
  Top Layer w2: pad.48 pad.49 pad.50 pad.51 pad.52 pad.53 pad.54 pad.55 pad.56 pad.57 pad.58 pad.59 pad.60 pad.61 ; pad.63 pad.64 pad.65 pad.66 pad.67 pad.68 ; 70.485,39.624 81.535,50.674 86.936,50.674 89.39,48.22 J9.2
  Bottom Layer w0.2: v1(1.27,43.18) P1.2 ; v1(4.826,40.518) 17.902,40.518 pad.48 ; M1.1 45.281,22.19 45.691,22.6 S5.1@48,22.6 ; pad.59 48,40.38 S6.1@48,42.4 ; S6.1@48,35.6 48,29.4 S5.1@48,22.6 ; J10.8 58.815,10.668 55.386,7.239 50.361,7.239 48,9.6 48,16.4 S5.1@48,22.6 ; v1(68.192,24.389) 80.206,24.389 v1(82.314,22.281) ; pad.68 70.485,39.37 70.485,39.624 ; v1@82.312,22.312 85.347,22.312 85.762,22.728 85.762,25.653 85.439,25.977 v1(85.439,26.002)
  Bottom Layer w0.3: v1(27.696,17.79) 31.623,13.863 v1(31.623,12.954)
  Bottom Layer w2: pad.48 pad.49 pad.50 pad.51 pad.52 pad.53 pad.54 pad.55 pad.56 pad.57 pad.58 pad.59 pad.60 pad.61 pad.63 pad.64 pad.65 pad.66 pad.67 pad.68 ; 70.485,39.624 81.516,50.655 86.955,50.655 89.39,48.22 J9.2
  other v2: 20.32,2.54 22.86,2.54 25.4,2.54 27.94,2.54 30.48,2.54 33.02,2.54 35.56,2.54 38.1,2.54 40.64,2.54 43.18,2.54 45.72,2.54 48.26,2.54 50.8,2.54 53.34,2.54 49.53,8.89 55.88,11.43 44.45,12.7 41.91,15.24 58.42,15.24 54.61,16.51 39.37,17.78 48.895,19.431 45.974,22.352 55.88,22.86 48.514,25.781 35.56,30.48 73.66,34.29 13.97,36.83 73.66,36.83 76.2,36.83 13.97,38.1 78.74,38.1 13.97,39.37 73.66,39.37 76.2,39.37 13.97,40.64 78.74,40.64 76.2,41.91 78.74,43.18 20.32,48.26 19.05,49.53
LED1_GND: J5.1 T1.5 T1.6 T1.7 T1.8 | length 11
  Top Layer w0.2: 20.447,43.942 20.828,43.942 T1.6 ; J5.1@27.051,47.117 26.968,47.117 26.968,46.609 J5.1
  Top Layer w3: 20.447,43.942 23.622,47.117 J5.1@27.051,47.117
LED2_GND: J5.2 T2.5 T2.6 T2.7 T2.8
LED3_GND: J5.3 T3.5 T3.6 T3.7 T3.8 | length 4.8
  Top Layer w2.5: 31.877,43.307 31.894,43.324 32.586,44.016 32.586,44.289 33.435,45.138 33.708,45.138 J5.3
LED4_GND: J5.4 T4.5 T4.6 T4.7 T4.8 | length 4.2
  Top Layer w2.5: 36.449,43.493 38.281,45.324 38.281,45.901 J5.4
LED5_GND: J5.5 T6.5 T6.6 T6.7 T6.8 | length 3.6
  Top Layer w3: 41.783,43.434 42.799,44.45 J5.5
LED6_GND: J5.6 T7.5 T7.6 T7.7 T7.8 | length 3.2
  Top Layer w3: 46.609,43.434 J5.6
LED7_GND: J5.7 T8.5 T8.6 T8.7 T8.8 | length 3.7
  Top Layer w3: J5.7 50.419,44.704 51.689,43.434
LED8_GND: J5.8 T9.5 T9.6 T9.7 T9.8 | length 4.4
  Top Layer w3: J5.8 54.407,46.609 57.023,43.993 57.023,43.434
LED9_GND: J5.9 T10.5 T10.6 T10.7 T10.8
LED10_GND: J5.10 T11.5 T11.6 T11.7 T11.8
LED-V: R18.2 U2.2 | length 10.3
  Top Layer w0.2: R18.2 20.803,19.977 v1(21.227,20.401) ; v1(24.446,20.911) 24.998,21.463 27.305,21.463 27.468,21.3 U2.2
  Bottom Layer w0.2: v1(21.227,20.401) 21.737,20.911 v1(24.446,20.911)
NetC15_1: C15.1 U2.5 U5.3 | length 8.6
  Top Layer w0.3: C15.1 26.401,14.097 27.569,14.097 U5.3 29.083,15.611 29.083,17.653 28.968,17.768 U2.5
NetC16_2: C16.2 U2.6 U5.1 | length 6.7
  Top Layer w0.3: U2.6 29.468,17.903 30.847,16.524 U5.1 33.171,16.524 C16.2
NetF1_1: F1.1 J9.1
NetL2_1: L2.1 R18.1 | length 1.7
  Top Layer w0.2: R18.1 19.177,17.551 19.248,17.48 L2.1
NetR1_1: R1.1 T2.4 | length 1.6
  Top Layer w0.3: R1.1 T2.4
NetR2_1: R2.1 T3.4 | length 1.6
  Top Layer w0.3: R2.1 T3.4
NetR3_1: R3.1 T4.4 | length 1.6
  Top Layer w0.3: R3.1 T4.4
NetR4_1: R4.1 T6.4 | length 1.6
  Top Layer w0.3: R4.1 T6.4
NetR5_1: R5.1 T7.4 | length 1.6
  Top Layer w0.3: R5.1 T7.4
NetR14_1: R14.1 T1.4 | length 1.6
  Top Layer w0.3: R14.1 T1.4
NetR19_1: R19.1 T8.4 | length 1.6
  Top Layer w0.3: R19.1 T8.4
NetR20_1: R20.1 T9.4 | length 1.6
  Top Layer w0.3: R20.1 T9.4
NetR21_1: R21.1 T10.4 | length 1.6
  Top Layer w0.3: R21.1 T10.4
NetR22_1: R22.1 T11.4 | length 1.6
  Top Layer w0.3: R22.1 T11.4
NRST: C14.2 J1.4 R6.1 U2.7 | length 24.2
  Top Layer w0.2: J1.4 15.83,29.21 16.3,29.68 R6.1 C14.2 19.264,28.486 v1(19.881,27.869) ; U2.7 v1(29.968,24.897)
  Bottom Layer w0.2: v1(19.881,27.869) 23.05,24.7 29.771,24.7 v1(29.968,24.897)
PWM1: R14.2 U2.32 | length 10.5
  Top Layer w0.2: R14.2 23.183,33.871 24.029,33.025 27.85,33.025 29.222,31.653 29.222,30.891 28.968,30.637 U2.32
PWM2: R1.2 U2.31 | length 6.5
  Top Layer w0.2: R1.2 29.228,33.871 29.524,33.576 29.524,30.342 29.468,30.286 U2.31
PWM3: R2.2 U2.30 | length 6.7
  Top Layer w0.2: U2.30 29.968,32.68 31.159,33.871 R2.2
PWM4: R3.2 U2.29 | length 11.5
  Top Layer w0.2: U2.29 30.468,31.364 30.816,31.712 37.135,31.712 37.991,32.568 37.991,33.871 R3.2
PWM5: R4.2 U2.10 | length 22.6
  Top Layer w0.2: U2.10 31.468,21.601 31.168,21.901 31.168,25.624 v1(31.75,26.205) ; v1(38.753,31.856) 40.768,33.871 R4.2
  Bottom Layer w0.2: v1(31.75,26.205) 35.058,26.205 38.753,29.901 v1(38.753,31.856)
PWM6: R5.2 U2.11 | length 28.1
  Top Layer w0.2: v1(31.68,22.103) 31.968,21.814 U2.11 ; v1(47.491,33.533) 47.829,33.871 R5.2
  Bottom Layer w0.2: v1(31.68,22.103) 37.396,22.103 37.547,22.253 38.701,22.253 39.846,23.398 44.113,23.398 46.367,25.652 46.367,32.409 v1(47.491,33.533)
PWM7: R19.2 U2.21 | length 27.4
  Top Layer w0.2: U2.21 36.34,25.888 v1(36.366,25.862) ; v1(42.03,32.466) 44.151,32.466 44.468,32.784 44.468,35.006 45.611,36.149 47.669,36.149 48.05,35.768 48.05,34.816 48.393,34.473 49.472,34.473 50.074,33.871 R19.2
  Bottom Layer w0.2: v1(36.366,25.862) 36.366,26.446 42.03,32.11 v1(42.03,32.466)
PWM8: R20.2 U2.22 | length 30.6
  Top Layer w0.2: U2.22 37.084,26.388 v1(37.153,26.319) ; v1(45.167,34.816) 47.216,32.766 48.133,32.766 48.538,33.171 59.426,33.171 59.454,33.87 R20.2
  Bottom Layer w0.2: v1(37.153,26.319) 41.519,30.685 41.519,31.167 v1(45.167,34.816)
PWM9: R21.2 U2.40 | length 53
  Top Layer w0.2: U2.40 26.777,25.888 v1(26.924,26.035) ; R21.2 65.301,33.871 65.627,33.546 v1(65.627,32.974)
  Bottom Layer w0.2: v1(26.924,26.035) 29.938,26.035 30.65,25.322 37.293,25.322 41.782,29.812 41.782,30.535 46.807,35.56 46.807,37.028 47.181,37.402 48.685,37.402 51.136,34.951 51.136,32.326 51.585,31.877 64.53,31.877 v1(65.627,32.974)
PWM10: R22.2 U2.41 | length 59.2
  Top Layer w0.2: U2.41 27.166,25.388 27.511,25.733 27.511,26.718 v1(25.781,28.448) ; v1(69.977,31.623) 69.977,33.853 69.995,33.871 R22.2
  Bottom Layer w0.2: v1(25.781,28.448) 26.821,28.448 36.428,38.056 62.136,38.056 68.568,31.623 v1(69.977,31.623)
RE/DE: U2.4 U6.2 U6.3 | length 73.2
  Top Layer w0.2: U2.4 28.502,20.047 28.502,22.164 28.676,22.338 v1(28.676,25.37) ; v1(63.671,33.431) 63.671,27.03 67.633,23.068 67.633,19.258 67.171,18.796 U6.3 ; U6.3 U6.3 ; U6.2 U6.2 U6.3
  Bottom Layer w0.2: v1(28.676,25.37) 26.028,25.37 26.003,25.395 26.003,26.243 26.371,26.611 30.384,26.611 31.311,25.684 34.994,25.684 39.236,29.926 39.236,31.455 45.484,37.703 59.399,37.703 v1(63.671,33.431)
RX_DEBUG: J1.7 U2.43 | length 16.1
  Top Layer w0.2: J1.7 14.547,30.179 14.547,31.323 14.903,31.679 15.995,31.679 16.51,31.164 v1(16.51,31.115) ; v1(22.133,24.859) 22.604,24.388 U2.43
  Bottom Layer w0.2: v1(16.51,31.115) 16.51,30.33 16.427,30.247 22.133,24.541 v1(22.133,24.859)
SCL: J3.2 J4.2 J10.5 M1.3 R8.1 U2.45 | length 124.5
  Top Layer w0.2: v1(22.987,23.495) 23.094,23.388 U2.45 ; R8.1 45.047,18.222 50.107,13.162 51.946,13.162 60.616,4.493 63.475,4.493 64.004,5.022 64.004,6.981 J10.5
  Top Layer w0.3: M1.3 43.035,27.305 R8.1
  Bottom Layer w0.2: J3.2 5.933,8.926 5.933,11.767 17.662,23.495 v1(22.987,23.495) 23.096,23.386 26.949,23.386 26.987,23.347 27.425,23.785 28.473,23.785 28.616,23.643 39.373,23.643 M1.3 ; J10.5 74.422,8.128 76.738,10.444 91.415,10.444 92.588,9.271 93.902,9.271 94.361,8.812 94.361,6.861 J4.2
SDA: J3.3 J4.3 J10.6 M1.4 R7.1 U2.46 | length 126.5
  Top Layer w0.2: U2.46 26.146,22.888 26.76,23.502 v1(26.76,23.887) ; R7.1 45.047,30.543 45.421,30.917 50.844,30.917 61.039,20.722 61.039,11.382 60.071,10.414 60.071,9.144 61.087,8.128 J10.6
  Top Layer w0.3: M1.4 43.035,29.845 R7.1
  Bottom Layer w0.2: J3.3 5.632,6.727 5.632,12.349 17.17,23.887 22.67,23.887 22.779,23.997 26.651,23.997 v1(26.76,23.887) 26.96,24.087 28.598,24.087 28.632,24.053 37.243,24.053 M1.4 ; J10.6 63.916,6.863 70.354,6.863 70.837,7.345 77.806,7.345 78.174,7.714 78.174,9.416 78.517,9.758 91.242,9.758 J4.3
SWCLK: J1.3 U2.37 | length 19
  Top Layer w0.2: J1.3 14.527,26.599 v1(15.919,26.599) ; v1(22.733,27.432) 22.777,27.388 U2.37
  Bottom Layer w0.2: v1(15.919,26.599) 15.919,31.496 16.171,31.748 19.303,31.748 22.733,28.319 v1(22.733,27.432)
SWDIO: J1.2 U2.34 | length 19.6
  Top Layer w0.2: J1.2 13.099,30.393 v1(13.099,32.05) ; U2.34 v1(27.968,31.898)
  Bottom Layer w0.2: v1(13.099,32.05) 27.816,32.05 v1(27.968,31.898)
T1: C31.1 J10.2 R42.1 S4.4 U2.3 | length 53.9
  Top Layer w0.2: U2.3 28,20.045 v1(28,22) ; v1(46.272,19.817) 49.276,16.813 49.276,14.986 50.038,14.224 v1(51.181,14.224) 51.392,14.224 51.981,14.813 C31.1 R42.1 ; v1(54.4,7.904) 54.4,7.803 59.154,3.048 J10.2
  Bottom Layer w0.2: v1(28,22) 28.696,22 30.879,19.817 v1(46.272,19.817) ; v1(51.181,14.224) 51.767,14.224 52,14.457 ; S4.4@52,16.4 52,14.457 ; v1(54.4,7.904) 52.704,9.6 52,9.6 52,14.457
T2: C32.1 J10.3 R43.1 S5.4 U2.25 | length 65.3
  Top Layer w0.2: U2.25 32.468,29.266 38.449,29.266 39.134,28.58 45.472,28.58 45.992,29.101 45.992,30.536 46.018,30.561 50.069,30.561 51.308,29.322 51.308,22.904 51.479,22.733 R43.1 ; R43.1@52.197,22.733 R43.1 ; v1(53.409,20.63) 52.56,20.63 C32.1 R43.1 ; J10.3 67.024,7.461 v1(67.024,11.46)
  Bottom Layer w0.2: S5.4@52,29.4 52,22.6 52,22.039 v1(53.409,20.63) 57.854,20.63 v1(67.024,11.46)
T3: C33.1 J10.4 R44.1 S6.4 U2.26 | length 125.9
  Top Layer w0.2: U2.26 31.968,30.786 ; v1(52.07,32.512) 51.855,32.512 50.615,31.272 32.403,31.272 31.968,30.837 31.968,30.786 ; R44.1 C33.1 52.108,24.313 54.562,21.859 54.562,19.764 53.721,18.923 53.721,15.367 55.118,13.97 55.118,10.795 60.325,5.588 J10.4 63.703,6.64 63.703,7.106 63.881,7.285 63.881,8.602 63.26,9.223 61.922,9.223 61.462,8.763 60.879,8.763 60.373,9.269 60.373,10.289 61.34,11.257 61.34,21.995 52.114,31.221 32.403,31.221 31.968,30.786
  Top Layer w0.3: v1(53.594,44.196) 54.343,44.196 54.737,43.802 54.737,36.449 55.626,35.56 v1(55.626,34.671)
  Bottom Layer w0.2: S6.4@52,35.6 S6.4@52,34.727 ; v1(52.07,32.512) 52,32.582 S6.4@52,34.727 ; v1(55.626,34.671) 52.056,34.671 S6.4@52,34.727
  Bottom Layer w0.3: S6.4@52,42.4 52,42.602 v1(53.594,44.196)
TX_DEBUG: J1.6 U2.42 | length 11.9
  Top Layer w0.2: J1.6 16.29,28.31 16.808,27.792 18.954,27.792 19.38,27.367 21.36,27.367 23.839,24.888 U2.42
VOLTAGE: D9.2 R15.1 R16.2 U2.19 | length 82.7
  Top Layer w0.2: U2.19 33.068,24.888 32.634,25.322 31.514,25.322 31.47,25.278 31.47,23.125 34.093,20.503 40.371,20.503 58.887,1.986 68.598,1.986 69.03,2.418 69.03,21.659 69.215,21.844 69.215,28.857 69.005,29.067 D9.2 67.503,29.067 66.973,28.537 R15.1 R16.2
pads on no net: J1.H J2.1 J6.0 J6.4 J7.0 J7.4 J10.7 U2.14 U2.15 U2.16 U2.27 U2.28 U2.33 U2.38 U2.39 U4.4 U4.5 VIS_1.3 VIS_2.3 VIS_3.3 VIS_4.3

## Polygon pours and split planes (outlines as drawn)
GND on Top Layer "TopLayer GND" (solid, remove dead copper, pour order 28): 0,52 100,52 100,0 0,0
LED2_GND on Top Layer "TopLayer GND" (solid, remove dead copper, pour order 18): 27.686,42.926 29.591,42.926 33.02,46.355 33.02,48.26 29.845,48.26 27.178,45.593 23.495,45.593 23.495,42.037 23.368,41.91 27.686,41.91
LED9_GND on Top Layer "TopLayer GND" (solid, remove dead copper, pour order 22): 56.515,48.26 59.69,48.26 59.69,47.244 65.024,41.91 58.166,41.91 56.515,43.561
+ALIM on Top Layer "TopLayer GND" (solid, remove dead copper, pour order 24): 64.135,51.943 64.135,44.45 74.168,44.45 78.359,48.641 78.359,51.943
LED10_GND on Top Layer "TopLayer GND" (solid, remove dead copper, pour order 20): 60.325,48.26 63.5,48.26 64.135,47.625 64.135,46.355 65.532,44.958 69.596,44.958 70.358,44.196 70.358,41.91 66.04,41.91 62.865,45.085 60.452,45.085
GND on Bottom Layer "TopLayer GND" (solid, remove dead copper, pour order 30): 0,0 0,52 100,52 100,0
+ALIM on Bottom Layer "TopLayer GND" (solid, remove dead copper, pour order 26): 64.135,51.943 64.135,44.45 74.168,44.45 78.359,48.641 78.359,51.943
NetF1_1 on Bottom Layer "TopLayer GND" (solid, remove dead copper, pour order 2): 88.265,45.72 71.12,28.575 71.12,24.765 80.899,24.765 94.234,38.1 98.425,38.1 98.425,45.593 98.552,45.72

## Keep-outs
Keep-Out Layer:
  the board outline again, w0.1

## Other copper
Top Layer:
  rectangle net GND: 55.372,38.1 70.358,41.021
  rectangle net GND: 17.78,38.1 54.356,41.021
  rectangle net LED10_GND: 66.04,41.91 70.358,43.688
  rectangle net LED9_GND: 60.706,41.91 65.024,43.688
  rectangle net LED8_GND: 55.372,41.91 59.69,43.688
  rectangle net LED7_GND: 50.038,41.91 54.356,43.688
  rectangle net LED6_GND: 44.704,41.91 49.022,43.688
  rectangle net LED5_GND: 39.37,41.91 43.688,43.688
  rectangle net LED4_GND: 34.036,41.91 38.354,43.688
  rectangle net LED3_GND: 28.702,41.91 33.02,43.688
  rectangle net LED2_GND: 23.368,41.91 27.686,43.688
  rectangle net LED1_GND: 18.034,41.91 22.352,43.688
  rectangle net GND: 66.04,36.449 69.088,39.497
  rectangle net GND: 60.706,36.449 63.754,39.497
  rectangle net GND: 55.372,36.449 58.42,39.497
  rectangle net GND: 50.038,36.449 53.086,39.497
  rectangle net GND: 44.704,36.449 47.752,39.497
  rectangle net GND: 39.37,36.449 42.418,39.497
  rectangle net GND: 34.036,36.449 37.084,39.497
  rectangle net GND: 28.702,36.449 31.75,39.497
  rectangle net GND: 23.368,36.449 26.416,39.497
  rectangle net GND: 18.034,36.449 21.082,39.497

## Silkscreen, mask and mechanical layers (free items; w line width, h text height)
Top Overlay:
  text "GND" at 99.568,46.99 h1 r90
  text "FAN" at 5.08,43.942 h1
  text "+ALIM" at 5.08,41.275 h1
  text "+12V" at 99.568,41.021 h1 r90
  text "N.C." at 5.08,38.735 h1
  text "GND" at 57.531,10.16 h1
  text "GND" at 87.884,10.033 h1
  text "+ALIM" at 9.398,9.906 h1
  text "SUNSTRIP LED 10x10W" at 20.574,9.017 h1.52
  text "SCL" at 67.31,7.62 h1
  text "SDA" at 57.531,7.493 h1
  text "SDA" at 87.884,7.493 h1
  text "SCL" at 9.398,7.366 h1
  text "V1.0     03-20" at 20.574,6.35 h1.52
  text "T3" at 58.547,5.08 h1
  text "T2" at 67.31,5.08 h1
  text "SDA" at 9.398,4.826 h1
  text "SCL" at 87.884,4.826 h1
  text "T1" at 58.928,2.54 h1
  text "+3.3V" at 67.31,2.54 h1
  text "GND" at 9.398,2.413 h1
  text "+ALIM" at 86.106,2.413 h1
Bottom Overlay:
  lines w0.2: 33.655,48.006 33.655,49.784 ; 41.275,48.006 41.275,49.784 ; 48.895,48.006 48.895,49.784 ; 56.515,48.006 56.515,49.784 ; 64.135,48.006 64.135,49.784
  text "OUT2" at 35.56,50.292 h1
  text "OUT4" at 43.18,50.292 h1
  text "OUT6" at 50.8,50.292 h1
  text "OUT8" at 58.42,50.292 h1
  text "OUT10" at 66.421,50.292 h1
  text "OUT1" at 31.75,48.387 h1
  text "OUT3" at 39.37,48.387 h1
  text "OUT5" at 46.99,48.387 h1
  text "OUT7" at 54.61,48.387 h1
  text "OUT9" at 62.23,48.387 h1
  text "+ALIM" at 69.977,48.387 h1
  text "GND" at 92.976,47.657 h1
  text "+12V" at 93.091,42.545 h1
  text "D-" at 82.181,19.59 h1
  text "D+" at 75.069,18.32 h1
  text "GND" at 80.657,15.018 h1
  text "D-" at 82.296,6.858 h1
  text "D+" at 75.184,5.588 h1
  text "GND" at 80.772,2.286 h1
Bottom Solder:
  lines w0.5: 3.048,41.656 1.905,41.656 1.27,41.021 1.27,37.719 2.286,36.703 7.366,36.703 11.557,32.512 11.557,24.892 10.414,23.749 10.414,20.447 1.524,11.557 1.524,1.778 2.54,0.762 90.678,0.762 92.916,3 97.488,3 98.425,3.937 98.425,10.795 88.519,20.701 88.519,31.242 86.233,33.528 84.709,33.528 ; 3.175,41.783 5.588,44.196 5.588,46.482 10.033,50.927 12.192,50.927 ; 75.946,50.673 68.326,50.673 65.659,48.006 65.659,46.609 72.644,46.609 76.073,50.038
  lines w0.75: 52.959,45.085 53.975,45.085 57.15,41.91
  lines w1: 19.05,39.37 69.85,39.37 71.501,39.37 82.677,50.546 87.503,50.546 89.829,48.22 93.98,48.22 ; 44.45,39.37 44.45,42.926 46.355,44.831 52.705,44.831 52.959,45.085 ; 57.15,39.37 57.15,41.91 ; 76.073,26.924 76.073,31.242 84.709,39.878 86.741,39.878 90.083,43.22 93.98,43.22 93.98,40.132 93.853,40.132 90.043,36.322 84.709,36.322 76.073,27.686
Mechanical 1:
  the board outline again, w0.1

## Text inside footprints (layer, text, board x,y; h text height)
J3: Top Overlay "1" at 7.485,13.849 h2 r270
J4: Top Overlay "1" at 90.678,0.889 h2 r90
J5: Top Overlay "1" at 23.834,43.809 h2
J9: Top Overlay "1" at 98.68,39.72 h2 r90